# EAGLE board eagle 2 boards (EAGLE 9.2.0)
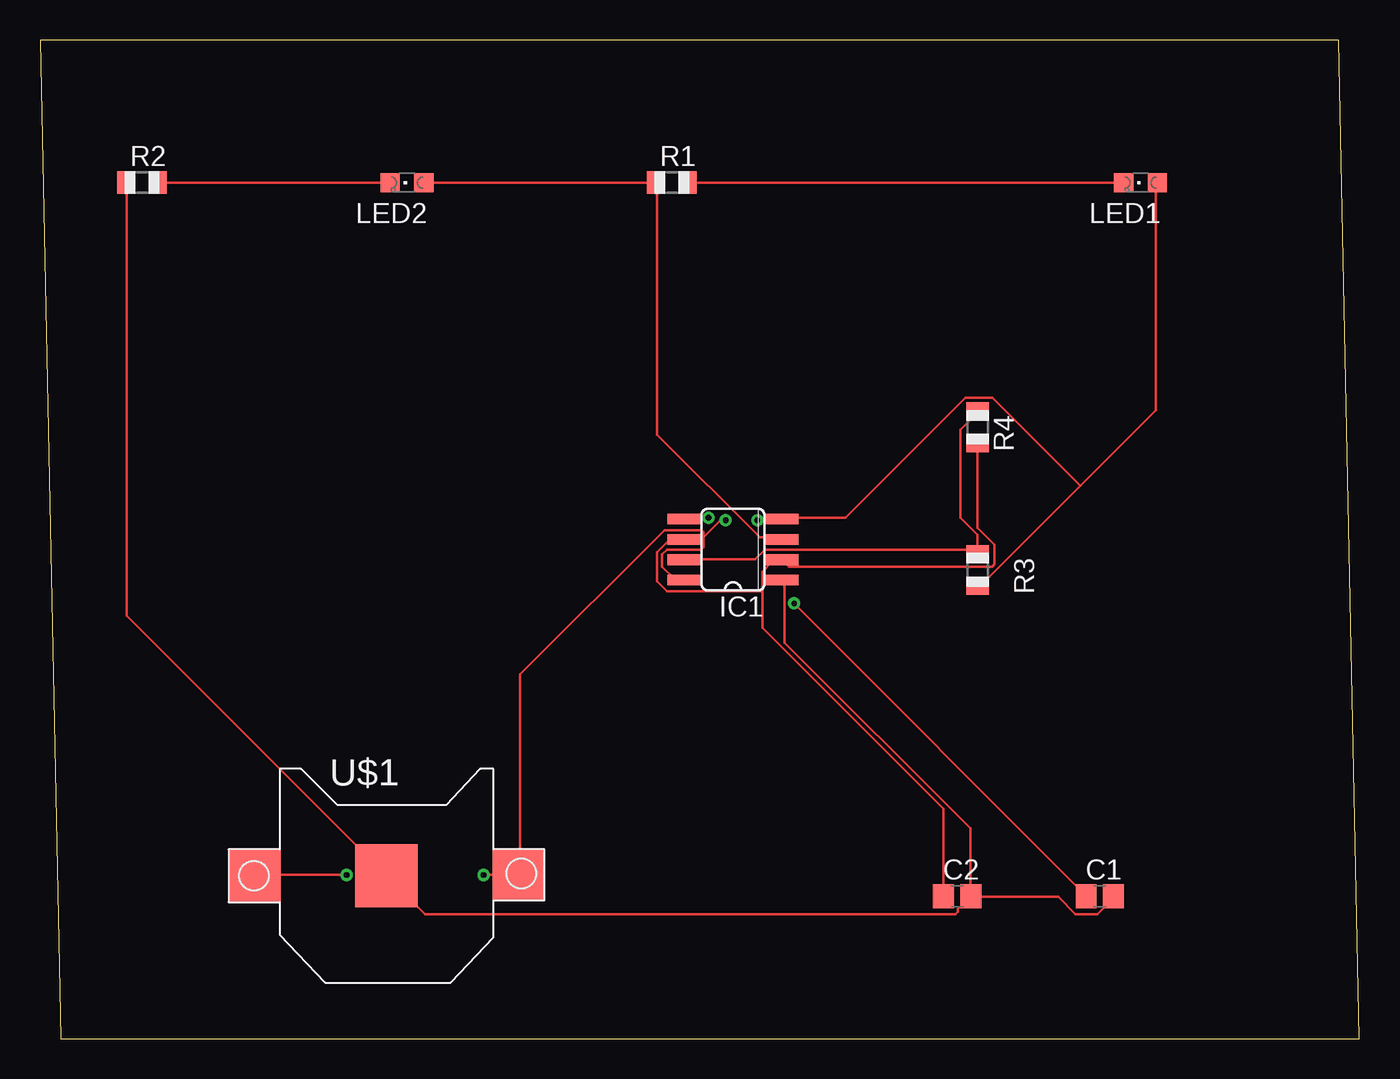
[diagram p0: board, top side]
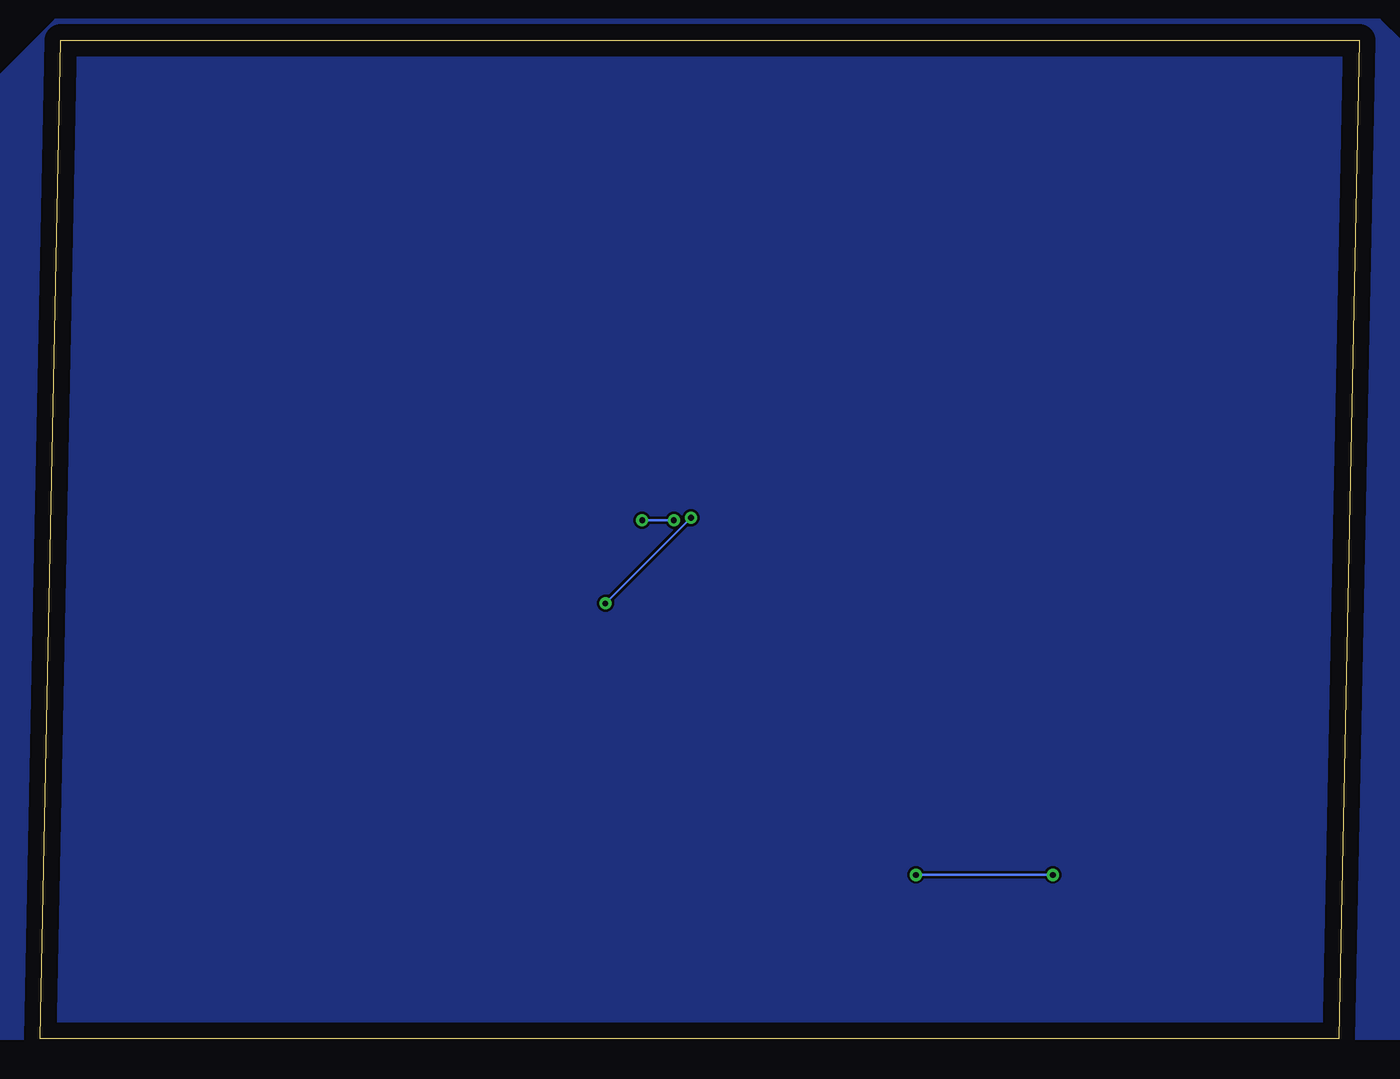
[diagram p1: board, bottom side, seen from below]

Size 82.22 x 62.22 mm. Coordinates in mm from the lower left corner, seen from the top.
Outline: 1.27,0 82.22,0 80.95,62.22 0,62.22 1.27,0
Copper layers (1*16): Top 0.035mm / dielectric 1.5mm / Bottom 0.035mm
Design rules "default": minimum track width 6mil, minimum drill 0.35mm, track to track 6mil, track to pad 6mil, pad to pad 6mil, via to via 6mil, smd to smd 6mil, copper to edge 40mil, drill to drill 6mil, minimum pad ring 10mil, minimum via ring 8mil, stop-mask expansion 4mil, vias tented up to drill 0mil, thermal gap 10mil

## Footprints (pad centres in the part's own frame; a part is rotated, then mirrored left to right if it is on the bottom)
C0805 = smd 1.3 x 1.5: 1 -0.85,0; 2 0.85,0
SO08 = smd 0.66 x 2.032: 1 -1.905,-3.073; 2 -0.635,-3.073; 3 0.635,-3.073; 4 1.905,-3.073; 5 1.905,3.073; 6 0.635,3.073; 7 -0.635,3.073; 8 -1.905,3.073
CHIPLED_0805 = smd 1.2 x 1.2: A 0,-1.05; C 0,1.05
R0805 = smd 1.1 x 1.4: 1 -1,0; 2 1,0
CR1220-SMD = smd 3.2 x 3.2: +$1 -8.2,0; +$2 8.2,0 | smd 3.9 x 3.9: - 0,0

## Placement (x,y rotation side)
C1  0.01uf  [C0805]  66.04,8.89 0 top
C2  22uf  [C0805]  57.15,8.89 0 top
IC1  LM555D  [SO08]  43.18,30.48 90 top
LED1  red  [CHIPLED_0805]  68.58,53.34 90 top
LED2  red  [CHIPLED_0805]  22.86,53.34 90 top
R1  100  [R0805]  39.37,53.34 0 top
R2  100  [R0805]  6.35,53.34 0 top
R3  1k  [R0805]  58.42,29.21 270 top
R4  100k  [R0805]  58.42,38.1 270 top
U$1  [CR1220-SMD]  21.59,10.16 0 top

## Library data of the parts
C1 C2 IC1 LED1 LED2 R1-R4 U$1 = adafruit

## Nets
GND: C1.2 C2.2 IC1.1 R2.1 U$1.-
N$1: LED1.C R1.2
N$2: LED2.C R2.2
N$4: IC1.3 LED2.A R1.1
N$5: IC1.7 R3.1 R4.1
N$6: C1.1 IC1.5
N$8: C2.1 IC1.2 IC1.6 R4.2
N$9: IC1.4 IC1.8 LED1.A R3.2 U$1.+$1 U$1.+$2

## Tracks (layer width: path | path; a pad name or v marks a point on that pad's centre or on a via)
GND
  Top 0.152: C2.2 58.12,8.84 63.45,8.84 64.52,7.77 65.89,7.77 66.95,8.84 C1.2 | IC1.1 46.38,28.5 46.38,24.69 57.96,13.11 57.96,8.99 C2.2 | R2.1 5.38,53.34 5.38,26.36 U$1.- 23.98,7.77 57.05,7.77 57.2,7.92 57.2,8.08 57.96,8.84 C2.2
  pour Bottom: -1.27,63.5 81.28,63.5 129.54,15.24 114.3,0 -7.62,0 -7.62,57.15 -2.54,62.23
N$1
  Top 0.152: R1.2 LED1.C
N$2
  Top 0.152: R2.2 LED2.C
N$4
  Top 0.152: LED2.A R1.1 38.46,53.34 38.46,37.64 44.86,31.24 46.23,31.24 IC1.3
N$5
  Top 0.152: 58.42,30.48 58.42,31.39 57.35,32.46 57.35,37.95 58.42,39.01 R4.1 | 58.42,30.48 45.16,30.48 44.55,29.87 40.13,29.87 IC1.7 | 58.42,30.48 R3.1
N$6  (via drill 0.35)
  Top 0.152: v46.99,27.13 65.13,8.99 C1.1 | v41.66,32.46 40.13,32.46 IC1.5
  Bottom 0.152: v41.66,32.46 v46.99,27.13
N$8
  Top 0.152: R4.2 58.42,31.85 59.49,30.79 59.49,29.57 59.33,29.41 46.69,29.41 IC1.2 46.23,29.72 45.62,29.72 45.01,29.11 45.01,27.89 | 45.01,27.89 45.01,25.6 56.29,14.33 56.29,8.99 C2.1 | 45.01,27.89 39.07,27.89 38.46,28.5 38.46,30.33 39.22,31.09 39.98,31.09 IC1.6
N$9  (via drill 0.35)
  Top 0.152: 64.82,34.44 58.73,28.35 58.42,28.35 R3.2 | 64.82,34.44 69.55,39.17 69.55,53.34 LED1.A | 64.82,34.44 59.33,39.93 57.66,39.93 50.19,32.46 46.38,32.46 IC1.4 46.23,32.31 v44.7,32.31 | 41.35,31.24 41.35,31.55 41.2,31.7 38.91,31.7 29.92,22.71 29.92,10.21 U$1.+$2 29.77,10.21 v27.63,10.21 | 41.35,31.24 41.35,30.63 41.2,30.48 39.07,30.48 38.76,30.18 38.76,29.41 39.52,28.65 39.98,28.65 IC1.8 | v19.1,10.21 13.46,10.21 U$1.+$1 | v42.72,32.31 42.42,32.31 41.35,31.24
  Bottom 0.152: v27.63,10.21 v19.1,10.21 | v42.72,32.31 v44.7,32.31